# Altium PCB Dashboard2023.PcbDoc
Units mm, origin at the board's own origin, x right, y up, seen from the top; angles counter-clockwise.
Board outline 253.34 x 63.75 mm, 2 copper layers (Top Layer, Bottom Layer); 97 components, 80 nets, 366 pads, 75 vias.
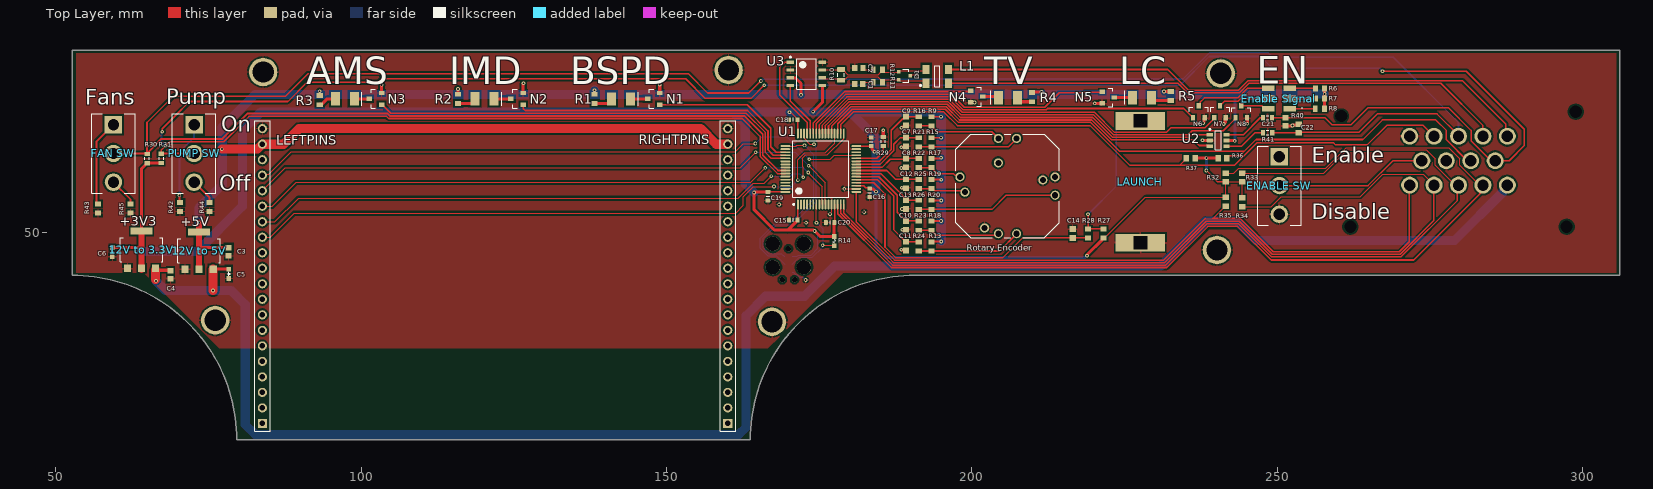
[diagram p0: Top Layer view]
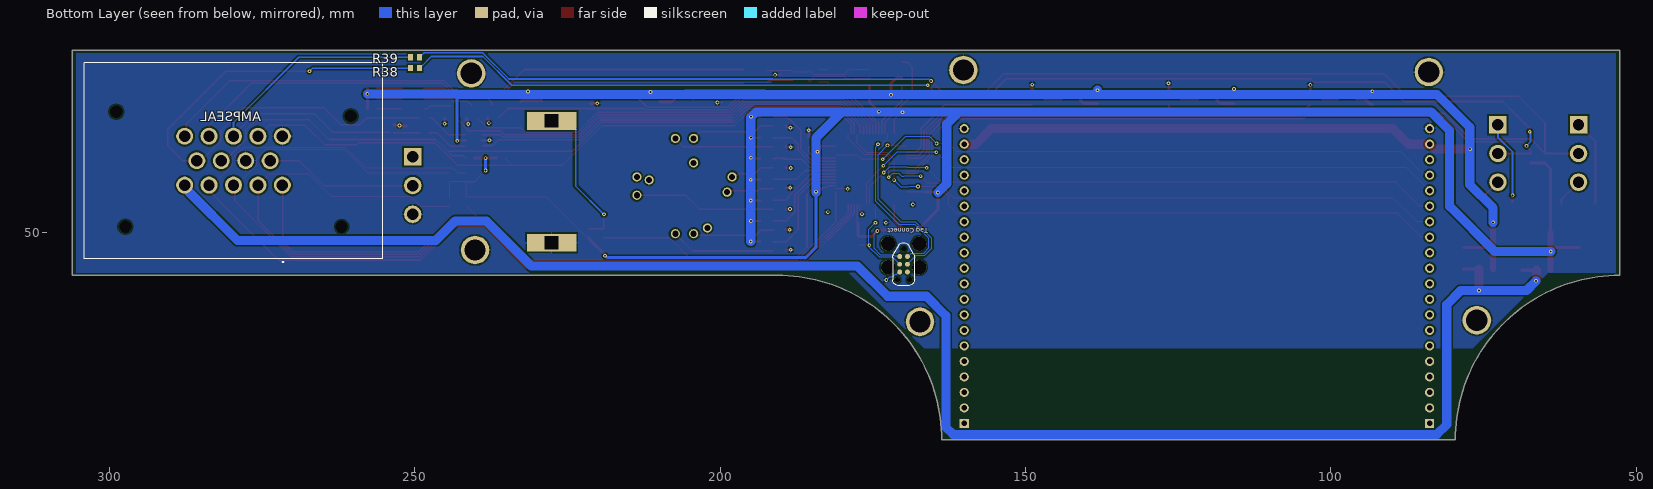
[diagram p1: Bottom Layer view, seen from below]
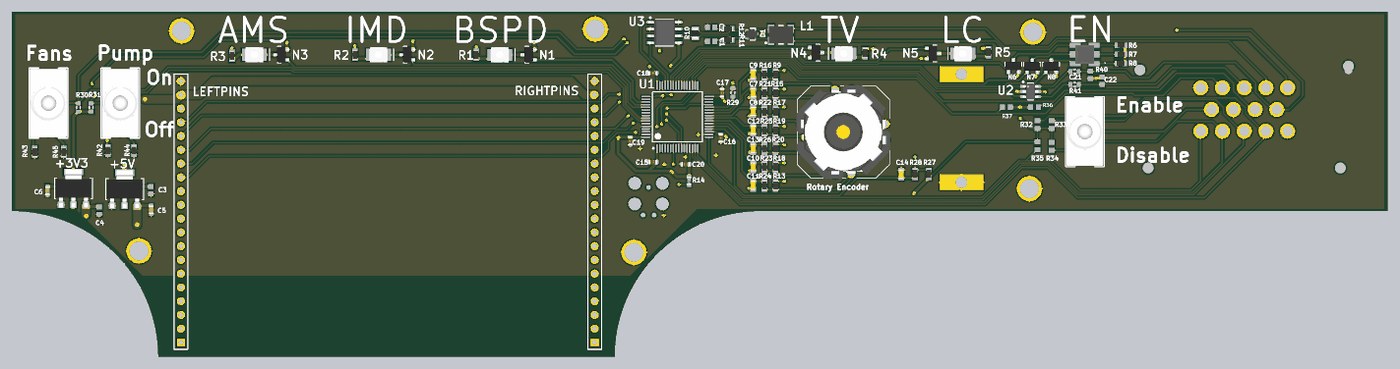
[diagram p2: 3D render of the assembled board from above, using the file's embedded part models]
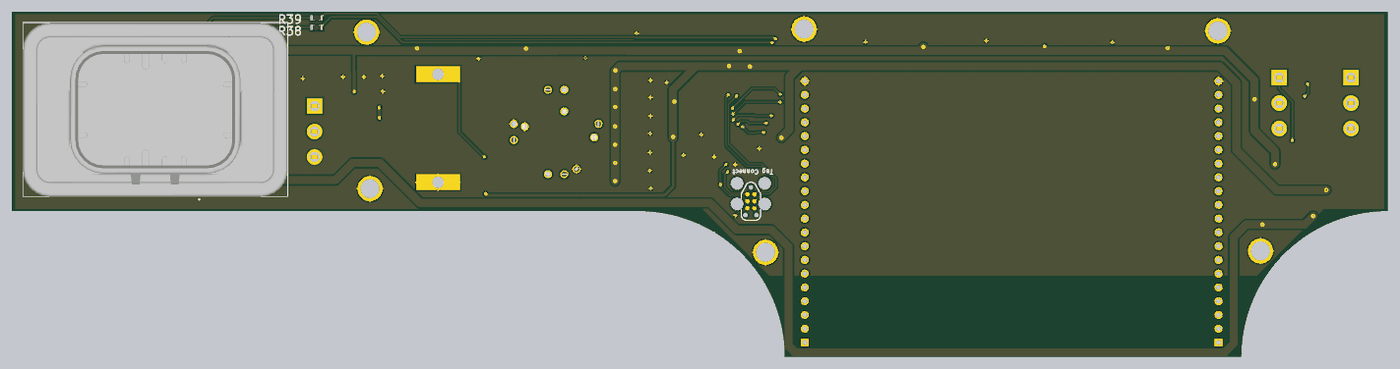
[diagram p3: 3D render of the assembled board from below, using the file's embedded part models]

## Layer stack, top to bottom
Top Solder: solder mask 0.0102, Solder Resist, Dk 3.5
Top Layer: signal copper 0.0356
Dielectric 1: dielectric 0.32, FR-4, Dk 4.8
Bottom Layer: signal copper 0.0356
Bottom Solder: solder mask 0.0102, Solder Resist, Dk 3.5

## Board outline
79.629,16.129 ccw(c52.705,16.129) 52.705,43.053 52.705,79.883 306.045,79.883 306.045,43.053 190.627,43.053 ccw(c190.627,16.129) 163.703,16.129

## Design rules (kind name [scope] priority, off if disabled: settings)
Clearance [All] p1: gap=0.3 ignorepadtopadclearanceinfootprint=FALSE except(0.13: SMDPad-SMDPad; 0.15: Arc-Arc Arc-Track Track-Track; 0.2: Arc-SMDPad Track-SMDPad)
Height [All] p1: minheight=0 maxheight=250.4 prefheight=12.7
PolygonConnect [All] p1: connectstyle=Relief reliefconductorwidth=0.254 reliefentries=4 polygonreliefangle="90 Angle" airgapwidth=0.254
RoutingVias [All] p1: holewidth=0.3 width=0.6 viastyle="Through Hole" minholewidth=0.3 minwidth=0.6 maxholewidth=0.3 maxwidth=0.6
SolderMaskExpansion [All] p1: expansion=0.102 istentingtop=FALSE
Width [All] p1: maxlimit=3 minlimit=0.2 preferedwidth=0.5 minimp=50.000000 maximp=50.000000 favimp=50.000000
29 further rules are at their usual default settings.

## Classes and differential pairs
component class DASH_SWITCHES: C14 "ENABLE SW" "FAN SW" LAUNCH "PUMP SW" R27 R28 R38 R39 R42 R43 R44 R45
component class DASH_REGULATORS: "12V to 3.3V" "12V to 5V" .6 C3 C4 C5 C6 C21 C22 R40 R41 U2
component class DASH_MICROCONTROLLER: C15 C16 C17 C18 C19 C20 R29 R30 R31 U1
component class DASH_CAN: C1 C2 D1 L1 R10 R11 R12 U3

## Components (designator, comment, footprint, x,y, rotation, side; value= is the part's Value field where it differs from the comment)
"12V to 3.3V" "LDO-3.3V-SPX1117" SOT223 64.033,47.246 r0 top
"12V to 5V" "LDO-SOT223_SPX1117" SOT223 73.457,47.092 r0 top
AMPSEAL "776262-1" 7762621 279.655,61.486 r0 bottom
AMS "XZMDK45S" LED_XZFBB45S 97.333,71.933 r0 top
BSPD "XZMDK45S" LED_XZFBB45S 142.545,71.907 r0 top
C1 "560p" CAPC1608X87X35NL15T15 181.468,74.397 r0 top
C2 "560p" CAPC1608X87X35NL15T15 181.483,76.962 r0 top
C3 "2.2 uf" CAPC1608X87X35NL15T15 78.308,46.914 r90 top
C4 "4.7 uf" CAPC1608X87X35NL15T15 68.783,43.155 r90 top
C5 "4.7u" CAP-0603 78.334,43.294 r90 top
C6 "2.2u" CAP-0603 59.258,46.839 r90 top
C7 "10n" CAPC1608X90X35ML10T15 189.205,64.872 r90 top
C8 "10n" CAPC1608X90X35ML10T15 189.205,61.468 r90 top
C9 "10n" CAPC1608X90X35ML10T15 189.205,68.301 r90 top
C10 "10n" CAPC1608X90X35ML10T15 189.205,51.232 r90 top
C11 "10n" CAPC1608X90X35ML10T15 189.205,47.828 r90 top
C12 "10n" CAPC1608X90X35ML10T15 189.205,58.039 r90 top
C13 "10n" CAPC1608X90X35ML10T15 189.205,54.635 r90 top
C14 "10n" CAPC1608X90X35ML10T15 216.484,49.886 r270 top
C15 "1uF" CAPC0603(1608)100_L 170.764,52.095 r0 top
C16 "1uF" CAPC0603(1608)100_L 183.236,56.566 r90 top
C17 "1uF" CAPC0603(1608)100_L 183.49,64.902 r270 top
C18 "1uF" CAPC0603(1608)100_L 170.764,68.529 r0 top
C19 "1uF" CAPC0603(1608)100_L 166.599,56.002 r90 top
C20 "1uF" CAPC0603(1608)100_L 176.784,51.689 r0 top
C21 "2.2 uf" CAPC1608X87X35NL15T15 251.333,68.199 r90 top
C22 "2.2 uf" CAPC1608X87X35NL15T15 253.492,67.096 r270 top
D1 "PESD1CAN-UX" FP-SOT323-MFG 188.951,75.717 r0 top
"Enable Signal" "XZFBBM2ACRDG92W-3" XZFBBM2ACRDG92W3 250.266,71.984 r180 top
"ENABLE SW" "A101SYCB04" FP-A101SYCB04-MFG 250.317,57.734 r0 top
"FAN SW" "A101SYCB04" FP-A101SYCB04-MFG 59.436,62.992 r0 top
IMD "XZMDK45S" LED_XZFBB45S 120.193,71.933 r0 top
L1 "744235900" "WE-CNSW 1812" 194.335,75.616 r0 top
LAUNCH "Fun Button from Home Depot for Dash 2022!" "New footprint 1" 227.584,48.376 r0 top
LC "XZFBB45S" LED_XZFBB45S 227.838,72.136 r180 top (schematic designator LAUNCH)
LEFTPINS "Header 20" HDR1X20 83.82,18.796 r90 top
N1 "NMOS-SOT23" SOT23 147.879,71.933 r90 top
N2 "NMOS-SOT23" SOT23 125.527,71.933 r90 top
N3 "NMOS-SOT23" SOT23 102.337,71.933 r90 top
N4 "NMOS-SOT23" SOT23 200.787,72.314 r270 top
N5 "NMOS-SOT23" SOT23 222.326,72.161 r270 top
N6 "NMOS-SOT23" SOT23 237.15,69.827 r0 top
N7 "NMOS-SOT23" SOT23 240.614,69.818 r0 top
N8 "NMOS-SOT23" SOT23 244.079,69.802 r0 top
"PUMP SW" "A101SYCB04" FP-A101SYCB04-MFG 72.644,62.992 r0 top
R1 "200" RESC1608X55X25ML10T15 138.227,71.933 r90 top
R2 "200" RESC1608X55X25ML10T15 115.875,71.933 r90 top
R3 "200" RESC1608X55X25ML10T15 93.218,71.73 r90 top
R4 "100" RESC1608X55X25ML10T15 209.855,72.212 r90 top
R5 "100" RESC1608X55X25ML10T15 232.537,72.39 r90 top
R6 "200" RESC1608X55X25ML10T15 256.972,73.66 r0 top
R7 "120" RESC1608X55X25ML10T15 256.972,71.984 r0 top
R8 "120" RESC1608X55X25ML10T15 256.946,70.307 r0 top
R9 "5000" RESC1608X55X25ML10T15 193.345,68.25 r90 top
R10 "0805" RESC0805(2012)_L 178.562,75.859 r90 top value="120 o"
R11 "100" RESC1608X55X25ML10T15 184.582,74.651 r0 top
R12 "100" RESC1608X55X25ML10T15 184.582,76.708 r0 top
R13 "5000" RESC1608X55X25ML10T15 193.345,47.777 r90 top
R14 "10k" RES-0603 177.419,48.641 r90 top
R15 "5000" RESC1608X55X25ML10T15 193.345,64.821 r90 top
R16 "10K" RESC1608X55X25ML10T15 191.287,68.25 r90 top
R17 "5000" RESC1608X55X25ML10T15 193.345,61.417 r90 top
R18 "5000" RESC1608X55X25ML10T15 193.345,51.181 r90 top
R19 "5000" RESC1608X55X25ML10T15 193.345,57.988 r90 top
R20 "5000" RESC1608X55X25ML10T15 193.345,54.585 r90 top
R21 "10K" RESC1608X55X25ML10T15 191.287,64.821 r90 top
R22 "10K" RESC1608X55X25ML10T15 191.287,61.417 r270 top
R23 "10K" RESC1608X55X25ML10T15 191.287,51.181 r270 top
R24 "10K" RESC1608X55X25ML10T15 191.287,47.777 r270 top
R25 "10K" RESC1608X55X25ML10T15 191.287,57.988 r90 top
R26 "10K" RESC1608X55X25ML10T15 191.287,54.585 r270 top
R27 "5000" RESC1608X55X25ML10T15 221.564,49.886 r270 top
R28 "10K" RESC1608X55X25ML10T15 219.024,49.886 r270 top
R29 "Res3" J1-0603 185.471,64.952 r90 top value=1K
R30 "Res3" J1-0603 64.948,62.154 r270 top value=1K
R31 "Res3" J1-0603 67.285,62.179 r270 top value=1K
R32 "1.5k" RESC1608X55X30ML15T15 241.554,59.055 r270 top
R33 "1.5k" RESC1608X55X30ML15T15 244.221,59.055 r270 top
R34 "1.5k" RESC1608X55X30ML15T15 244.221,54.991 r90 top
R35 "1.5k" RESC1608X55X30ML15T15 241.554,55.118 r90 top
R36 "1.5k" RESC1608X55X30ML15T15 241.009,62.23 r180 top
R37 "1.5k" RESC1608X55X30ML15T15 235.839,62.23 r0 top
R38 "DNP" RESC1608X55X25ML10T15 249.936,76.962 r0 bottom
R39 "DNP" RESC1608X55X25ML10T15 249.936,78.74 r0 bottom
R40 "Res3" J1-0603 248.387,68.834 r180 top value=1K
R41 "Res3" J1-0603 248.412,66.421 r180 top value=1K
R42 "DNP" RESC1608X55X25ML10T15 70.358,54.229 r90 top
R43 "DNP" RESC1608X55X25ML10T15 56.896,53.975 r90 top
R44 "0ohm" RESC1608X55X25ML10T15 75.184,54.229 r90 top
R45 "0ohm" RESC1608X55X25ML10T15 62.23,53.975 r90 top
RIGHTPINS "Header 20" HDR1X20 160.02,18.796 r90 top
"Rotary Encoder" "RKJXT1F42001" RKJXT1F42001 205.816,57.658 r270 top
"Tag Connect" "TC2030-MCP-NL" TC2030-MCP-NL 169.951,44.856 r270 bottom
TV "XZM2DG45S" LED_XZFBB45S 205.892,72.136 r180 top
U1 "STM32F446RET6" STM-LQFP64_L 175.26,60.452 r90 top
U2 "SN74LVC2G17DBVR" DBV0006A_N 240.309,65.126 r0 top
U3 "SN65HVD256DR" D0008A_L 172.889,76.022 r0 top

## Footprints (in the part's own frame and the unit in brackets; to place one, negate y for a bottom-side part, rotate by r counter-clockwise, add the part's x,y. Pads: shape width x height; smd on the part's side, far side on the other; paste and mask are expansions set on the pad)
7762621 [mm]
  round 2.775 hole 1.85: 1(-8,3.675) 2(-4,3.675) 3(0,3.675) 4(4,3.675) 5(8,3.675) 6(-6,-0.325) 7(-2,-0.325) 8(2,-0.325) 9(6,-0.325) 10(-8,-4.325) 11(-4,-4.325) 12(0,-4.325) 13(4,-4.325) 14(8,-4.325)
  round 1 hole 2 unplated: 15(-19.2,-7.625) 16(-17.7,10.475) 17(17.7,10.475) 18(19.2,-8.325)
  silkscreen extent -24.4,-16.37 24.4,16.37, body extent -24.4,-16.34 24.4,15.76, height 34.38
CAP-0603 [mm]
  rect 0.8x0.75 smd: 1(-0.75,0) 2(0.75,0)
  silkscreen extent -0.3,-0.2 0.3,0.2, body extent -0.8,-0.4 0.8,0.42, height 0.81
CAPC0603(1608)100_L [mm] "Chip Capacitor, Body 1.6x0.8mm, Height 1.0mm, IPC High Density"
  rrect25% 0.66x0.76 smd: 1(-0.7,0) 2(0.7,0)
  silkscreen extent 0,-0.3 0,0.3, body extent -0.8,-0.4 0.8,0.4, height 0.95
CAPC1608X87X35NL15T15 [mm] "Chip Capacitor, 2-Leads, Body 1.60x0.80mm, IPC Medium Density"
  rect 0.9x1 smd: 1(-0.675,0) 2(0.675,0)
  body extent -0.87,-0.48 0.87,0.47, height 0.87
CAPC1608X90X35ML10T15 [mm] "Chip Capacitor, 2-Leads, Body 1.7x0.9mm, IPC Low Density"
  rect 0.95x1.05 smd: 1(-0.725,0) 2(0.725,0)
  body extent -0.85,-0.45 0.85,0.45, height 0.9
D0008A_L [mm] "SOIC, 8-Leads, Body 5x4mm, Pitch 1.27mm, IPC High Density"
  rrect18% 1.25x0.55 smd: 1(-2.625,1.905) 2(-2.625,0.635) 3(-2.625,-0.635) 4(-2.625,-1.905) 5(2.625,-1.905) 6(2.625,-0.635) 7(2.625,0.635) 8(2.625,1.905)
  silkscreen extent -2.75,-2.5 1.6,2.85, body extent -3,-2.45 3,2.45, height 1.63
DBV0006A_N [mm] "SOT23, 6-Leads, Body 3.05x1.75mm, Pitch 0.95mm, IPC Medium Density"
  rrect17% 1x0.6 smd: 1(-1.375,0.95) 2(-1.375,0) 3(-1.375,-0.95) 4(1.375,-0.95) 5(1.375,0) 6(1.375,0.95)
  silkscreen extent -1.5,-1.55 0.5,1.92, body extent -1.42,-1.46 1.42,1.46, height 1.11
FP-A101SYCB04-MFG [mil]
  rect 112.37x112.37 hole 73 paste-39370.1 mask+0: 1(0,185)
  round 112.37 hole 73 paste-39370.1 mask+0: 2(0,0) 3(0,-185)
  silkscreen extent -140,-255 140,255, body extent -144,-259 144,259, height 10
FP-SOT323-MFG [mm]
  rect 0.55x0.6 smd paste-1000 mask+0: 1(-0.925,0.65) 2(-0.925,-0.65) 3(0.925,0)
  silkscreen extent -0.28,-1.1 0.67,1.1, body extent -1.33,-1.2 1.33,1.2, height 0.25
HDR1X20 [mm] "Connector; Header; 20 Position"
  rect 1.5x1.5 hole 0.9: 1(0,0)
  round 1.5 hole 0.9: 2(2.54,0) 3(5.08,0) 4(7.62,0) 5(10.16,0) 6(12.7,0) 7(15.24,0) 8(17.78,0) 9(20.32,0) 10(22.86,0) 11(25.4,0) 12(27.94,0) 13(30.48,0) 14(33.02,0) 15(35.56,0) 16(38.1,0) 17(40.64,0) 18(43.18,0) 19(45.72,0) 20(48.26,0)
  silkscreen extent -1.27,-1.27 49.53,1.27
J1-0603 [mm] "Chip Resistor, Body 1.6x0.8mm, IPC High Density"
  rect 0.7x0.9 smd: 1(-0.75,0) 2(0.75,0)
  silkscreen extent -0.2,-0.35 0.2,0.35, body extent -0.85,-0.48 0.85,0.48, height 0.9
LED_XZFBB45S [mm]
  rect 1.5x2.2 smd: A(-1.55,0) K(1.55,0)
  silkscreen extent 2.8,-1.1 2.8,1.1, body extent -1.75,-1.4 1.75,1.4, height 1.9
"New footprint 1" [mm]
  rect 8.112x2.912 hole 2.15 square: 1(0,0) 2(0,19.95)
RES-0603 [mm]
  rect 0.8x0.75 smd: 1(-0.75,0) 2(0.75,0)
  silkscreen extent -0.3,-0.2 0.3,0.2, body extent -0.8,-0.4 0.8,0.4, height 0.44
RESC0805(2012)_L [mm] "Chip Resistor, Body 2.0x1.3mm, IPC High Density"
  rrect25% 0.76x1.3 smd: 1(-0.9,0) 2(0.89,0)
  silkscreen extent -0.3,-0.55 0.3,0.55, body extent -1,-0.62 1,0.63, height 0.6
RESC1608X55X25ML10T15 [mm] "Chip Resistor, 2-Leads, Body 1.70x0.90mm, IPC Low Density"
  rect 0.8x1 smd: 1(-0.75,0) 2(0.75,0)
  body extent -0.85,-0.45 0.85,0.45, height 0.55
RESC1608X55X30ML15T15 [mm] "Chip Resistor, 2-Leads, Body 1.60x0.80mm, IPC Low Density"
  rect 0.9x1.05 smd: 1(-0.725,0) 2(0.725,0)
  body extent -0.87,-0.48 0.87,0.48, height 0.55
RKJXT1F42001 [mm]
  round 1.5 hole 1: 1(-1.5,-7.8) 2(1,-6.98) 3(6.86,-3.75) 4(7.8,-1.5) 5(7.8,1.5) 6(1.5,7.8) 7(-1,5.78) 8(-1.5,7.8) 9(-7.8,1.5) 10(-7.8,-1.5) 11(-3.8,-1.5)
  silkscreen extent -8.5,-8.5 8.5,8.5, body extent -8.6,-8.6 8.6,8.6, height 17.4
SOT23 [mm]
  rect 0.7x0.9 smd: 1(-0.95,-1) 2(0.95,-1) 3(0,1)
  silkscreen extent -1.55,0 1.55,0.71, body extent -1.45,-1.41 1.45,1.41, height 1.5
SOT223 [mm]
  rect 1.2x1.2 smd: 1(-2.3,-3.05) 2(0,-3.05) 3(2.3,-3.05)
  rect 3.6x1.2 smd: 4(0,3.05)
  silkscreen extent -3.5,-1.95 3.5,1.95, body extent -3.25,-3.52 3.25,3.5, height 1.8
STM-LQFP64_L [mm] "QFP, 64-Leads, Body 10x10mm, Pitch 0.5mm, IPC High Density"
  oval 1.6x0.3 smd: 1(-5.8,3.75) 2(-5.8,3.25) 3(-5.8,2.75) 4(-5.8,2.25) 5(-5.8,1.75) 6(-5.8,1.25) 7(-5.8,0.75) 8(-5.8,0.25) 9(-5.8,-0.25) 10(-5.8,-0.75) 11(-5.8,-1.25) 12(-5.8,-1.75) 13(-5.8,-2.25) 14(-5.8,-2.75) 15(-5.8,-3.25) 16(-5.8,-3.75) 33(5.8,-3.75) 34(5.8,-3.25) 35(5.8,-2.75) 36(5.8,-2.25) 37(5.8,-1.75) 38(5.8,-1.25) 39(5.8,-0.75) 40(5.8,-0.25) 41(5.8,0.25) 42(5.8,0.75) 43(5.8,1.25) 44(5.8,1.75) 45(5.8,2.25) 46(5.8,2.75) 47(5.8,3.25) 48(5.8,3.75)
  oval 0.3x1.6 smd: 17(-3.75,-5.8) 18(-3.25,-5.8) 19(-2.75,-5.8) 20(-2.25,-5.8) 21(-1.75,-5.8) 22(-1.25,-5.8) 23(-0.75,-5.8) 24(-0.25,-5.8) 25(0.25,-5.8) 26(0.75,-5.8) 27(1.25,-5.8) 28(1.75,-5.8) 29(2.25,-5.8) 30(2.75,-5.8) 31(3.25,-5.8) 32(3.75,-5.8) 49(3.75,5.8) 50(3.25,5.8) 51(2.75,5.8) 52(2.25,5.8) 53(1.75,5.8) 54(1.25,5.8) 55(0.75,5.8) 56(0.25,5.8) 57(-0.25,5.8) 58(-0.75,5.8) 59(-1.25,5.8) 60(-1.75,5.8) 61(-2.25,5.8) 62(-2.75,5.8) 63(-3.25,5.8) 64(-3.75,5.8)
  silkscreen extent -5.92,-4.6 4.6,4.6, body extent -5,-5 5,5, height 1.6
TC2030-MCP-NL [mm] "Conector ICD en placa"
  round 0.8 smd paste-0.4: 1(-1.27,-0.635) 2(-1.27,0.635) 3(0,-0.635) 4(0,0.635) 5(1.27,-0.635) 6(1.27,0.635)
  round 0.85 hole 0.9 unplated mask+0: ""(-2.54,0) ""(2.54,-1.016) ""(2.54,1.016)
  silkscreen extent -3.54,-1.8 3.5,1.8, body extent -3.54,-1.8 3.5,1.8
"WE-CNSW 1812" [mm] "SMD Line Filter, 4-Leads, Body 4.5x3.2mm"
  rect 1.15x1.55 smd: 1(-1.825,-1.125) 2(1.825,-1.125) 3(1.825,1.125) 4(-1.825,1.125)
  silkscreen extent -2.9,-1.7 0.43,1.7, body extent -2.25,-1.6 2.25,1.6, height 2.8
XZFBBM2ACRDG92W3 [mm]
  rect 2x0.9 smd: 1(-1.75,1.7) 3(-1.75,-1.7) 4(1.75,1.7) 6(1.75,-1.7)
  rect 2x1.2 smd: 2(-1.75,0) 5(1.75,0)
  silkscreen extent -3.8,1.5 -3.7,1.6, body extent -1.75,-1.75 1.75,1.75, height 1.35

## Part data
"12V to 3.3V": library part LDO-SOT223_SPX1117
"12V to 5V": library part CMP-015-000050-1, Design Item ID=LDO-SOT223_SPX1117, Source=ife19_Elec_Library.SchLib
AMPSEAL: "Connector", Manufacturer_Name="TE Connectivity", Mouser Part Number=571-776262-1, Arrow Part Number=776262-1, Arrow Price/Stock=https://www.arrow.com/en/products/776262-1/te-connectivity, Datasheet Link=http://www.te.com/commerce/DocumentDelivery/DDEController?Action=showdoc&DocId=Customer+Drawing%7F776262%7FA8%7Fpdf%7FEnglish%7FENG_CD_776262_A8.pdf%7F776262-1, Height=34mm, Manufacturer_Part_Number=776262-1, Mouser Price/Stock=https://www.mouser.co.uk/ProductDetail/TE-Connectivity-AMP/776262-1?qs=tLAa1RwIH6f%2FfrCrHR1d%252Bw%3D%3D
AMS BSPD IMD LC TV: library part CMP-009-000234-1, Design Item ID=LED_XZFBB45S, Source=ife19_Elec_Library.schlib
C1 C2 C3 C4 C21 C22: library part CMP-2006-03887-1, ".1 uf", Manufacturer=Kemet, Part Number=C0603C104J3RAC7867
C5 C6: library part CAP-0603
C7 C8 C9 C10 C11 C12 C13 C14: library part CMP-2100-03642-1, "Chip Capacitor, 10 nF, +/- 10%, 50 V, -55 to 125 degC, 0603 (1608 Metric), RoHS, Tape and Reel", Capacitance=10nF, Case Code (Imperial)=0603, Case Code (Metric)=1608, Dielectric=X7R, Dielectric Material=Ceramic, Insulation Resistance=10GR, Manufacturer=Murata, Max Operating Temperature=125degC, Min Operating Temperature=-55degC, Package Description="2-Pin Surface Mount Device, Body 1.6 x 0.8 mm", Package Quantity=1, Tolerance=10%, Voltage=50V, Case/Package=0603, Datasheet URL=http://search.murata.co.jp/Ceramy/image/img/A01X/G101/ENG/GRM188R71H103KA01-01.pdf, Datasheet Version=42401.0, Depth=0.8mm, Height=0.8mm, Lead Free=LeadFree, Length=1.6mm, Manufacturer URL=http://www.murata.com/, Material=Ceramic, Mount=SurfaceMount, Number of Pins=2, Package Reference=0603, Packaging=TapeandReel, REACH SVHC=Unknown, RoHSCompliant=True, Termination=SMD/SMT, Thickness=0.035inch, Voltage Rating=50V, Voltage Rating (DC)=50V, Width=0.031inch
C15 C16 C17 C18 C19 C20: library part CMP-005-000568-1, "Chip Capacitor, 1 uF, +/- 10%, 6.3 V, 0402 (1005 Metric)", Available Preview Images=2D, Design Item ID=CMP-001-00008-4, Source="Integrated_Library - 12.03.21 - 15.39.SchLib"
D1: library part CMP-14436-000006-1, "TVS DIODE 24V 50V SC70-3"
"Enable Signal": "LED", Manufacturer_Name=SunLED, Datasheet Link=https://www.sunledusa.com/products/spec/XZFBBM2ACRDG92W-3.pdf, Height=1.25mm, Manufacturer_Part_Number=XZFBBM2ACRDG92W-3
"ENABLE SW" "FAN SW" "PUMP SW": library part CMP-03408-000017-1, "SWITCH TOGGLE SPDT 0.4VA 20V", Actuator Color=Chrome, Contact Current Rating=400mA, Contact Resistance=10mR, Flammability Rating="UL94 V-1", Insulation Resistance=30MR, Max Operating Temperature=85°C, Max Voltage Rating (AC)=20V, Min Operating Temperature=-30°C, Package Quantity=100, Power Rating=400mW, Actuator Length=10.41mm, Actuator Material=Phenolic, Actuator Type="Standard Round", Contact Material=Copper, Contact Plating=Gold, Depth=6.86mm, Electrical Life=6000Cycles, ELV=Compliant, Illumination Type=Non-Illuminated, Lead Free="Lead Free", Max Voltage Rating (DC)=20V, Mount=Panel, Number of Poles=1, Number of Positions=2, Orientation=Straight, Packaging=Bulk, Radiation Hardening=No, REACH SVHC="No SVHC", RoHS Compliant=Yes, Series="Gemini A", Switch Function=On-On, Termination="PC Pins", Throw Configuration=SPDT, Voltage Rating (AC)=20V, Voltage Rating (DC)=20V
L1: library part CMP-1372-00007-1, "SMD Shielded Coupled Inductor WE-CNSW, Z=90 Ohm", Manufacturer="Wuerth Elektronik", ComponentLink1Description="Manufacturer URL", ComponentLink1URL=http://www.we-online.com, ComponentLink2Description=Datasheet, ComponentLink2URL=http://katalog.we-online.de/pbs/datasheet/744235900.pdf, Impedance="90 Ohm", PackageReference="WE-CNSW 1812", PartNumber=744235900
LAUNCH: library part HOME-DEPOT-BUTTON-DASH-2022-1, "This is the very fun and very interesting button from Home Depot to be used for the IFE Dashboard 2022"
LEFTPINS RIGHTPINS: "Header, 20-Pin", LatestRevisionDate=17-Jul-2002, LatestRevisionNote="Re-released for DXP Platform.", Publisher="Altium Limited"
N1 N2 N3 N4 N5 N6 N7 N8: library part CMP-009-000226-1, Design Item ID=NMOS-SOT23, Source=ife19_Elec_Library.schlib
R1 R2 R3 R4 R5 R6 R7 R8 R9 R11 R12 R13 R15 R16 R17 R18 R19 R20 R21 R22 R23 R24 R25 R26 R27 R28: library part CMP-009-000010-1, "Chip Resistor, 0 Ohm, 0.1 W, -55 to 155 degC, 0603 (1608 Metric)", Design Item ID=CMP-009-00006-4, Source="Integrated_Library - 12.03.21 - 15.39.SchLib"
R10: library part CMP-009-000170-1, "Chip Resistor, 4,7 Ohms, +/-5 %, 125 mW, -55 to 155 degC, 0805", Available Preview Images=2D, Design Item ID=CMP-009-00174-2, Source="Integrated_Library - 12.03.21 - 15.39.SchLib"
R14: library part RES-0603
R29 R30 R31 R40 R41: "Resistor", LatestRevisionDate=29-May-2009, LatestRevisionNote="IPC-7351 Footprint Added.", PackageDescription="Chip Resistor", PackageReference=J1-0603, Published=8-Jun-2000, Publisher="Altium Limited"
R32 R33 R34 R35 R36 R37: library part CMP-1012-00528-2, Manufacturer=Panasonic, Part Number=ERJ-3EKF1501V
R38 R39 R42 R44: library part CMP-009-000010-1, "Can be used to set dual set constant speed of pump with no PWM /  / Chip Resistor, 0 Ohm, 0.1 W, -55 to 155 degC, 0603 (1608 Metric)", Design Item ID=CMP-009-00006-4, Source="Integrated_Library - 12.03.21 - 15.39.SchLib"
R43 R45: library part CMP-009-000010-1, "Can be used to set dual set constant speed of fans with no PWM /  / Chip Resistor, 0 Ohm, 0.1 W, -55 to 155 degC, 0603 (1608 Metric)", Design Item ID=CMP-009-00006-4, Source="Integrated_Library - 12.03.21 - 15.39.SchLib"
"Rotary Encoder": "Switch", Manufacturer_Name=ALPS, Mouser Part Number=688-RKJXT1F42001, Datasheet Link=http://www.alps.com/prod/info/E/HTML/MultiControl/Switch/RKJXT/RKJXT1F42001.html, Height=17mm, Manufacturer_Part_Number=RKJXT1F42001, Mouser Price/Stock=https://www.mouser.co.uk/ProductDetail/ALPS/RKJXT1F42001?qs=6EGMNY9ZYDTsBzSTrhiL0w%3D%3D
"Tag Connect": library part CMP-003-000769-1, "Conector par ICD", Design Item ID=TC2030-MCP-NL, Source="Image Pasted at 2021-10-31 17-08.SchLib"
U1: library part CMP-0243-00218-1, "ARM Cortex-M4 32-bit MCU+FPU, 512 KB Flash, 128 KB Internal RAM, 50 I/Os, 64-Pin LQFP, -40 to 85 degC, Tray", I/Os (High Current)=50, Operating Frequency(F) (Processor speed) (MHz)=180, Package Description=LQFP64, Package Reference="64-Pin Low-profile Quad Flat Package, Body 10 x 10 mm, Pitch 0.5 mm", Supply Voltage(Vcc) min (V)=1.7, ComponentLink1Description="Manufacturer URL", ComponentLink1URL=http://www.st.com/, ComponentLink2Description=Datasheet, ComponentLink2URL=http://www.st.com/st-web-ui/static/active/en/resource/technical/document/datasheet/DM00141306.pdf, Core="ARM Cortex-M4", D/A Converter=2, DatasheetVersion="Rev. 6", FLASH Size (Prog) (kB)=512, Internal RAM Size (kB)=128, Mounting Technology="Surface Mount", Packing=Tray
U2: library part CMP-0859-00225-4, "Dual Schmitt-Trigger Buffer, DBV0006A, LARGE T&R", F @ Nom Voltage(Max)(Mhz)=150, Generic Part Number=SN74LVC2G17, ICC @ Nom Voltage(Max)(mA)=0.01, Manufacturer="Texas Instruments", Operating Temperature Range(C)="-40 to 125,-40 to 85", Rating=Catalog, tpd @ Nom Voltage(Max)(ns)=9.3,5.7,5.4,4.3, Voltage(Nom)(V)=1.8,2.5,3.3,5, 3-State Output=No, Bits(#)=2, DatasheetVersion=SCES381N, Input Type=CMOS/TTL, Logic=True, Output Drive (IOL/IOH)(Max)(mA)=32/-32, Output Type=CMOS, PackageReference=DBV0006A, Schmitt Trigger=Yes, Sub-Family="Non-Inverting Buffer/Driver", Technology Family=LVC, VCC(Max)(V)=5.5, VCC(Min)(V)=1.65
U3: library part CMP-0315-00070-2, "CAN Transceiver with Fast Loop Times for Highly Loaded Networks, 85 mA, 5 V, -40 to 125 degC, 8-pin SOIC (D), Green (RoHS & no Sb/Br)", Bus Fault Voltage(V)="-27 to 40", Drivers Per Package=1, Manufacturer="Texas Instruments", Rating=Catalog, Supply Voltage(s)(V)=5, Code_JEDEC=MS-012AA, ComponentLink1Description=Datasheet, ComponentLink1URL=http://www.ti.com/general/docs/lit/getliterature.tsp?genericPartNumber=SN65HVD256&fileType=pdf, DatasheetVersion=SLLSEA2, Eco-Plan="Green (RoHS & no Sb/Br)", Features="Short prop delay, Fast loop times, RXD supply input", ICC(Max)(mA)=85, Isolated=No, Mounting Technology="Surface Mount", PackageDescription="8-Pin Plastic Small Outline Integrated Circuit, 4.9 x 3.9 mm, Pitch 1.27 mm Pitch", PackageReference=D0008A, PackageVersion="revM, Jun-2011", PartNumber=SN65HVD256DR, Receivers Per Package=1, SubFamily=CAN

## Free pads (board coordinates)
  round 4.65 hole 3.5: 2(76.098,35.687) 2(83.947,76.327) 2(160.147,76.657) 2(167.259,35.433) 2(240.106,47.193) 2(240.741,76.098)
  round 2.375 hole 2.375 paste+0: 3(167.411,44.374) 3(167.411,48.184) 3(172.491,48.184) 3(172.494,44.377)

## Via types
v1: diameter 0.6, hole 0.3, Top Layer to Bottom Layer, 75 vias

## Nets (pads, with @x,y where several pads share a name; then routed paths per layer and width w, separated by ;. In a path a pad name is that pad's centre, name@x,y a point inside that pad or via, vN(x,y) a via of type N, cw(c..) or ccw(c..) an arc to the next point about the centre after c; other vN are vias at no path point)
+3.3V: "12V to 3.3V.2" "12V to 3.3V.4" "Tag Connect.1" C6.2 C15.2 C16.2 C17.2 C18.2 C19.2 C20.2 R9.2 R13.2 R14.2 R15.2 R17.2 R18.2 R19.2 R20.2 R27.2 R30.2 R31.2 R32.2 R33.2 R34.2 R35.2 R36.2 R37.2 U1.1 U1.13 U1.19 U1.32 U1.48 U1.64 U3.5 | length 379.4
  Top Layer w0.2: v1@170.371,69.672 171.464,68.579 C18.2 ; R27.2 221.664,49.136 228.372,55.843 R35.2 R32.2 R33.2 R34.2
  Top Layer w0.254: C19.2 U1.64 ; C15.2 171.501,52.132 171.501,54.643 U1.1 ; C18.2 171.51,68.483 U1.48 ; C20.2 177.533,51.738 177.533,53.967 177.51,53.99 U1.13 ; U1.19 181.069,57.693 182.286,57.693 182.628,57.351 C16.2@183.15,57.351 ; U1.32 C17.2 ; v1(238.379,60.198) 240.247,58.33 R32.2
  Top Layer w0.3: R13.2 193.376,48.559 194.939,48.559 v1(194.97,48.59) ; R18.2 194.957,51.931 v1(194.945,51.943) ; R20.2 193.364,55.315 194.951,55.315 v1(194.97,55.296) ; R19.2 193.364,58.719 194.951,58.719 v1(194.97,58.699) ; R17.2 v1@194.75,62.167 ; R15.2 193.351,65.577 194.939,65.577 v1(194.945,65.583) ; R9.2 193.358,69.013 194.906,69.013 v1(194.92,69.026)
  Top Layer w0.5: C6.2 63.972,47.589 64.008,47.625 ; 64.033,50.241 64.033,50.296 64.033,60.489 64.748,61.204 64.748,61.304 64.848,61.404 R30.2 64.961,61.416 67.272,61.416 R31.2 ; C19.2 164.476,56.702 164.365,56.591 v1(164.338,56.591) 164.338,53.772 167.646,50.464 169.863,50.464 174.045,50.464 174.217,50.292 v1(174.244,50.292) 175.145,49.391 177.294,49.391 177.404,49.501 177.404,51.609 C20.2 ; 169.863,50.444 171.464,52.046 C15.2 ; v1(173.99,69.85) 175.514,71.374 U3.5 ; C16.2@183.285,57.266 183.366,57.186 183.835,57.186 v1@184.258,56.763 ; C17.2 183.539,64.202 183.62,64.122 183.62,63.7 v1@184.029,63.291 ; v1(218.821,46.262) 218.84,46.281 218.84,46.412 221.314,48.886 221.314,48.986 221.464,49.136 R27.2 ; R37.2 v1(238.379,62.23) R36.2
  Top Layer w1: 64.008,43.915 64.008,47.625 64.008,50.015
  Bottom Layer w0.2: 170.586,46.126 171.361,46.126 171.59,46.355 173.66,46.355 174.752,47.447 174.752,49.81 174.27,50.292 v1(174.244,50.292)
  Bottom Layer w0.5: v1(184.277,56.744) 184.277,47.625 185.928,45.974 218.506,45.974 218.794,46.262 v1(218.821,46.262) ; v1(238.379,60.198) v1(238.379,62.23)
  Bottom Layer w1.5: v1(63.983,46.939) 73.152,46.939 80.543,54.331 80.543,66.736 83.606,69.799 160.884,69.799 ; v1(164.338,56.591) 162.886,58.043 162.886,67.796 160.884,69.799 ; v1@184.302,56.591 184.302,63.271 184.302,65.532 180.035,69.799 ; v1(194.97,48.59) v1(194.97,55.296) v1(194.97,58.699) 194.97,68.921 194.092,69.799 180.035,69.799 ; 160.884,69.799 180.035,69.799
  other v1: 194.945,62.281 184.048,63.271 170.129,69.748
+5: "12V to 5V.2" "12V to 5V.4" C3.2 LEFTPINS.19 R1.2 R2.2 R3.2 R4.2 R5.2 R6.2 R7.2 R8.2 RIGHTPINS.19 U2.5 U3.3 | length 319.5
  Top Layer w0.5: 73.431,47.891 73.733,47.589 C3.2 ; v1(115.849,73.558) 115.862,73.546 115.862,72.695 R2.2 ; U3.3 170.289,75.362 171.119,75.362 172.009,74.473 v1(172.009,72.593) ; R4.2@209.855,72.835 R4.2@209.924,72.904 ; R4.2@209.924,73.031 v1@211.36,73.031 ; v1@211.36,72.904 v1@211.379,72.923 ; v1@231.445,73.001 v1@231.451,73.007 ; v1@231.451,73.134 R5.2@232.537,73.134 ; U2.5 241.695,65.115 242.934,65.115 243,65.049 v1(243.027,65.049) ; R8.2 257.709,70.32 257.709,73.647 R6.2
  Top Layer w1: 73.457,44.042 73.431,44.067 73.431,47.891 v1(73.431,51.714) v1@73.457,51.689
  Top Layer w1.5: v1(77.191,63.703) 83.007,63.703 LEFTPINS.19 87.274,64.516 89.84,67.081 155.575,67.081 158.14,64.516 RIGHTPINS.19
  Bottom Layer w0.5: v1(115.849,73.558) 115.869,73.539 115.869,72.726 115.926,72.669 ; v1(243.027,65.049) 243.027,68.86 243.053,68.886 243.053,72.669
  Bottom Layer w1.5: v1(73.431,51.714) 73.431,54.077 77.241,57.887 77.241,67.285 82.626,72.669 93.193,72.669 115.926,72.669 138.176,72.669 ; v1(138.201,73.355) 138.201,72.695 138.176,72.669 ; v1(257.734,72.746) 243.129,72.746 243.053,72.669 205.636,72.669 205.615,72.69 192.781,72.69 192.761,72.669 172.009,72.669 138.176,72.669
  other v1: 211.379,73.05 231.445,73.128 93.193,73.177
+12: "12V to 3.3V.3" "12V to 5V.3" AMPSEAL.5 C4.2 C5.2 | length 283.7
  Top Layer w0.5: 66.308,43.915 66.35,43.872 68.741,43.872 C4.2 ; 75.757,44.042 75.758,44.043 C5.2 C5.2
  Top Layer w1.5: v1@66.308,42.407 66.308,43.915 ; v1(75.743,40.564) 75.757,40.578 75.757,44.042
  Bottom Layer w1.5: v1(66.396,42.139) 67.97,40.564 v1(75.743,40.564) 78.715,40.564 81.026,38.252 81.026,18.605 82.635,16.996 161.837,16.996 163.017,18.176 163.017,36.449 166.192,39.624 172.568,39.624 177.495,44.552 230.861,44.552 238.252,51.943 243.332,51.943 246.507,48.768 279.019,48.768 287.018,56.767 287.018,56.829 287.655,57.466 AMPSEAL.5
AMS_LED_ON: N3.1 U1.53 | length 71.7
  Top Layer w0.254: N3.1 103.429,70.891 103.529,70.891 104.849,69.571 163.017,69.571 166.179,66.409 166.179,63.158 167.112,62.225 168.775,62.225 168.798,62.202 U1.53
BSPD_LED_ON: N1.1 U1.51 | length 25.6
  Top Layer w0.3: N1.1 163.205,70.983 167.056,67.132 167.056,64.084 167.938,63.202 U1.51
CAN_H: AMPSEAL.14 L1.3 | length 98.3
  Top Layer w0.254: L1.3 232.06,76.741 235.454,73.346 243.641,73.346 245.186,74.891 280.303,74.891 287.379,67.815 287.379,66.087 AMPSEAL.14
CAN_L: AMPSEAL.13 L1.2 | length 93.4
  Top Layer w0.254: L1.2 233.738,74.491 235.287,72.942 243.809,72.942 245.353,74.487 276.744,74.487 276.818,74.413 cw(c276.639,74.233) 276.819,74.412 283.655,67.576 AMPSEAL.13
CAN_RX: U1.44 U3.4 | length 9.2
  Top Layer w0.254: U3.4 170.264,71.6 173.51,68.354 U1.44
CAN_TX: U1.45 U3.1 | length 14.8
  Top Layer w0.254: U3.1 169.342,77.927 168.504,77.089 168.504,72.614 173.01,68.108 U1.45
D_1: C7.2 R21.2 U1.26 | length 12.7
  Top Layer w0.254: U1.26 184.925,61.202 187.196,63.472 187.196,64.514 188.279,65.597 191.262,65.597 R21.2
ENABLE_SIG: "ENABLE SW.2" AMPSEAL.6 | length 25
  Top Layer w0.254: 250.317,57.734 264.846,57.734 268.923,61.811 AMPSEAL.6
ENCODE_A: C9.2 R16.2 U1.27 | length 15.1
  Top Layer w0.254: U1.27 184.854,61.702 186.792,63.64 186.792,66.802 188.667,68.678 188.857,68.678 C9.2 189.23,69 R16.2
ENCODE_B: C11.2 R24.1 U1.21 | length 17.7
  Top Layer w0.254: U1.21 181.893,58.702 184.528,58.702 187.173,56.058 187.173,50.535 189.155,48.553 C11.2 191.262,48.553 R24.1
FAN_EN: "FAN SW.2" R30.1 R39.1 U1.57 | length 315.6
  Top Layer w0.254: 64.948,68.076 69.262,72.39 87.63,72.39 91.273,76.033 153.57,76.033 156.705,72.898 163.466,72.898 v1(165.432,74.864)
  Top Layer w0.3: 59.436,62.992 R30.1@64.895,62.992 ; R30.1 R30.1@64.948,63.044 ; 64.948,68.076 R30.1@64.948,63.044 ; U1.57 168.265,60.202 165.735,62.732 165.735,66.142 162.733,69.144 104.672,69.144 104.27,69.545 81.432,69.545 77.267,65.38 67.283,65.38 R30.1@64.948,63.044
  Bottom Layer w0.254: v1(165.432,74.864) 165.489,74.864 165.754,75.129 190.681,75.129 191.284,75.129 191.339,75.184 234.569,75.184 238.887,79.502 248.424,79.502 248.813,79.113 248.913,79.113 249.186,78.84 R39.1
FANPWM: AMPSEAL.12 C22.2 R39.2 R41.1 | length 68.5
  Top Layer w0.254: R41.1 C22.2 ; 254,66.472 263.347,66.472 266.344,69.469 276.149,69.469 279.655,65.963 AMPSEAL.12
  Bottom Layer w0.254: R39.2 268.986,78.74 279.655,68.071 AMPSEAL.12
FANPWM3.3: U1.37 U2.3 | length 67.1
  Top Layer w0.254: U1.37 177.01,67.434 180.211,70.636 195.785,70.636 197.945,68.476 219.604,68.476 222.849,65.231 236.267,65.231 237.195,64.303 238.807,64.303 U2.3
FLOW0: AMPSEAL.11 R37.1 U1.34 | length 108.5
  Top Layer w0.254: U1.34 178.51,67.745 180.592,69.828 195.348,69.828 197.612,67.564 219.329,67.564 225.806,61.087 234.046,61.087 ; R37.1 235.114,62.155 234.046,61.087 ; AMPSEAL.11 273.841,67.626 267.93,67.626 264.693,64.389 259.512,64.389 259.131,64.77 246.714,64.77 243.031,61.087 234.046,61.087
FLOW1: AMPSEAL.8 R36.1 U1.35 | length 118.2
  Top Layer w0.254: U1.35 178.01,67.863 180.379,70.232 195.618,70.232 197.778,68.072 219.437,68.072 224.185,63.324 244.553,63.324 ; R36.1 241.734,62.305 242.057,62.628 243.857,62.628 244.553,63.324 ; AMPSEAL.8 281.089,61.811 277.673,65.228 277.673,66.751 275.946,68.478 267.208,68.478 264.008,65.278 246.507,65.278 244.553,63.324
GND: "12V to 3.3V.1" "12V to 5V.1" "ENABLE SW.3" "Rotary Encoder.3" "Rotary Encoder.7" "Rotary Encoder.8" "Tag Connect.5" AMPSEAL.7 AMPSEAL.10 C1.1 C2.1 C3.1 C4.1 C5.1 C6.1 C7.1 C8.1 C9.1 C10.1 C11.1 C12.1 C13.1 C14.1 C15.1 C16.1 C17.1 C18.1 C19.1 C20.1 C21.1 C22.1 D1.3 LAUNCH.1 LEFTPINS.20 N1.2 N2.2 N3.2 N4.2 N5.2 N6.2 N7.2 N8.2 pad.2 R29.2 R42.1 R43.1 R44.1 R45.1 RIGHTPINS.20 U1.12 U1.18 U1.31 U1.47 U1.60 U1.63 U2.2 U3.2 U3.8 | length 26.9
  Top Layer w0.2: v1(176.759,53.061) 176.759,53.169 177.01,53.42 U1.12 ; v1@179.045,57.252 v1(179.094,57.202) U1.18 ; D1.3 190.014,75.856 v1(190.983,75.856)
  Top Layer w0.5: N3.2 103.337,74.203 v1(103.353,74.219) ; N2.2 126.527,74.457 v1(126.568,74.498) ; v1(148.869,74.27) 148.879,74.26 N1.2 ; R29.2 v1(185.471,66.802) ; v1(188.426,47.23) 188.445,47.211 189.097,47.211 C11.1 ; v1(188.426,60.616) 188.445,60.635 189.097,60.635 C8.1 ; v1(188.426,64.02) 188.445,64.039 189.097,64.039 C7.1 ; v1(188.468,67.208) 188.495,67.208 188.637,67.351 188.98,67.351 C9.1 ; v1(188.493,57.379) 188.513,57.359 189.159,57.359 C12.1 ; v1(188.544,53.899) 188.55,53.905 189.199,53.905 C13.1 ; v1(188.595,50.495) 188.601,50.501 189.199,50.501 C10.1 ; N4.2@199.787,71.237 199.871,71.321 200.412,71.321 v1(200.431,71.34) ; v1@220.099,71.204 N5.2@221.319,71.204 ; N5.2@221.107,71.069 N5.2@221.115,71.077 ; v1(237.744,65.151) 237.757,65.138 238.922,65.138 U2.2 ; v1(237.846,67.961) 237.846,67.988 238,68.142 238,68.727 N6.2 ; v1(241.22,67.821) 241.22,67.849 241.464,68.092 241.464,68.718 N7.2 ; N8.2 245.065,68.765 245.065,67.888 v1(245.085,67.869) ; C21.1 v1@252.476,67.524 ; v1(252.476,67.564) 252.503,67.564 252.574,67.635 253.306,67.635 C22.1@253.442,67.771
  Bottom Layer w0.2: 170.586,43.586 170.736,43.586 171.156,43.166 171.387,43.166 171.8,42.754 172.282,42.754 v1(172.771,42.266)
  other v1: 172.847,51.664 182.347,53.391 168.427,54.635 220.091,71.196
IMD_LED_ON: N2.1 U1.52 | length 48.5
  Top Layer w0.3: N2.1 126.527,70.349 126.848,70.028 163.246,70.028 166.606,66.668 166.606,63.594 167.498,62.702 168.81,62.702 U1.52
LAUNCH_EN: C14.2 R28.2 U1.20 | length 49.5
  Top Layer w0.254: U1.20 183.911,58.202 185.758,56.355 185.758,47.668 187.477,45.949 205.071,45.949 208.283,49.161 C14.2 218.999,49.161 R28.2
LAUNCH_LED_ON: N5.1 U1.42 | length 52.2
  Top Layer w0.254: U1.42 174.519,66.261 174.519,67.89 179.285,72.656 196.622,72.656 198.718,70.56 211.911,70.56 214.274,72.923 218.415,72.923 ; 218.415,73.05 N5.1@221.265,73.05
NetAMS_A: AMS.A R3.1 | length 3
  Top Layer w0.5: R3.1 93.368,71.13 93.634,71.13 94.437,71.933 AMS.A
NetAMS_K: AMS.K N3.3 | length 2.5
  Top Layer w0.5: AMS.K N3.3
NetBSPD_A: BSPD.A R1.1 | length 3.2
  Top Layer w0.5: R1.1 140.495,71.183 140.995,71.683 BSPD.A
NetBSPD_K: BSPD.K N1.3 | length 2.8
  Top Layer w0.5: BSPD.K 144.12,71.933 N1.3
NetC1_2: C1.2 R11.1 | length 1.8
  Top Layer w0.2: C1.2 182.397,74.651 R11.1
NetC2_2: C2.2 R12.1 | length 1.8
  Top Layer w0.2: C2.2 182.412,76.708 R12.1
NetD1_1: D1.1 L1.4 R10.2 R12.2 U3.7 | length 18.1
  Top Layer w0.2: U3.7 175.56,76.703 178.516,76.703 R10.2 178.832,76.749 179.673,75.908 184.632,75.908 185.332,76.608 R12.2@185.332,76.627 ; R12.2 R12.2@185.332,76.627 ; D1.1@188.026,76.327 185.632,76.327 R12.2@185.332,76.627 ; D1.1 188.026,76.381 188.201,76.556 192.325,76.556 L1.4
NetD1_2: D1.2 L1.1 R10.1 R11.2 U3.6 | length 18.2
  Top Layer w0.2: U3.6 175.666,75.235 178.286,75.235 R10.1 178.806,75.202 179.317,75.202 179.629,75.514 184.568,75.514 185.332,74.751 R11.2@185.332,74.742 ; R11.2 R11.2@185.332,74.742 ; L1.1 192.122,74.879 188.201,74.879 188.026,75.054 D1.2 188.001,75.042 185.632,75.042 R11.2@185.332,74.742
"NetEnable Signal_1": "Enable Signal.1" R8.1 | length 4.2
  Top Layer w0.254: 252.016,70.284 256.173,70.284 R8.1
"NetEnable Signal_2": "Enable Signal.2" R7.1 | length 4.2
  Top Layer w0.254: 252.016,71.984 R7.1
"NetEnable Signal_3": "Enable Signal.3" R6.1 | length 4.2
  Top Layer w0.254: 252.016,73.684 256.198,73.684 R6.1
"NetEnable Signal_4": "Enable Signal.4" N8.3 | length 4.7
  Top Layer w0.254: N8.3 247.448,70.802 247.966,70.284 248.516,70.284
"NetEnable Signal_5": "Enable Signal.5" N7.3 | length 8.4
  Top Layer w0.254: N7.3 240.614,70.918 240.837,71.141 240.937,71.141 241.374,71.577 243.586,71.577 243.992,71.984 248.516,71.984
"NetEnable Signal_6": "Enable Signal.6" N6.3 | length 12.6
  Top Layer w0.254: N6.3@237.227,71.004 237.373,71.15 237.373,71.409 238.049,72.085 243.523,72.085 245.121,73.684 248.516,73.684
"NetFAN SW_1": "FAN SW.1" R43.2 | length 14.2
  Top Layer w0.3: R43.2 56.892,54.725 56.642,54.975 56.642,64.897 59.436,67.691
"NetFAN SW_3": "FAN SW.3" R45.2 | length 4.7
  Top Layer w0.3: 59.436,58.293 62.23,55.499 R45.2
NetIMD_A: IMD.A R2.1 | length 3.2
  Top Layer w0.5: R2.1 118.143,71.183 118.643,71.683 IMD.A
NetIMD_K: IMD.K N2.3 | length 2.8
  Top Layer w0.5: IMD.K N2.3
NetLAUNCH_2: LAUNCH.2 R27.1 R28.1 | length 25.3
  Top Layer w0.254: v1@219.024,53.035 R28.1 R27.1
  Bottom Layer w0.254: v1@219.024,53.035 223.655,57.666 223.655,66.997 224.984,68.326 LAUNCH.2
  other v1: 219.009,53.051
NetLAUNCH_A: LC.A R5.1 | length 4.5
  Top Layer w0.5: LC.A@229.257,71.628 229.257,71.788 LC.A@229.888,72.419 ; LC.A@229.388,72.009 229.433,71.964 LC.A@229.884,71.513 ; LC.A@229.884,71.64 R5.1 ; R5.1@232.537,71.513 R5.1@232.637,71.513
NetLAUNCH_K: LC.K N5.3 | length 3
  Top Layer w0.5: N5.3 LC.K@226.288,72.161
NetN4_3: N4.3 TV.K | length 2.6
  Top Layer w0.5: N4.3 TV.K@204.165,72.314 ; TV.K@204.165,72.187 TV.K@204.342,72.009
"NetPUMP SW_1": "PUMP SW.1" R42.2 | length 13.6
  Top Layer w0.3: v1(70.231,56.134) 70.231,55.106 R42.2
  Bottom Layer w0.3: v1@70.231,56.261 70.231,63.234 72.644,65.647 72.644,67.691
"NetPUMP SW_3": "PUMP SW.3" R44.2 | length 4.4
  Top Layer w0.3: 72.644,58.293 75.184,55.753 R44.2
NetR4_1: R4.1 TV.A | length 2.8
  Top Layer w0.5: TV.A@207.442,72.009 207.442,71.835 TV.A@207.942,71.335 ; TV.A@207.942,71.462 R4.1
NetR9_1: "Rotary Encoder.10" R9.1 R16.1 | length 13.9
  Top Layer w0.254: R16.1 R9.1 194.297,66.548 203.226,66.548 204.316,65.458
NetR13_1: "Rotary Encoder.5" R13.1 R24.2 | length 17.2
  Top Layer w0.254: R24.2 R13.1 204.486,47.027 207.316,49.858
NetR15_1: "Rotary Encoder.9" R15.1 R21.1 | length 16.6
  Top Layer w0.254: R21.1 R15.1 205.929,64.071 207.316,65.458
NetR17_1: "Rotary Encoder.1" R17.1 R22.2 | length 8.2
  Top Layer w0.254: R22.2 R17.1 194.322,59.69 196.98,59.69 197.273,59.396 197.441,59.396 ; 198.016,59.158 197.679,59.158 197.441,59.396 ; 198.182,59.563 198.044,59.425 197.47,59.425 197.441,59.396
NetR18_1: "Rotary Encoder.4" R18.1 R23.2 | length 13.7
  Top Layer w0.254: R23.2 191.287,50.594 191.451,50.431 R18.1 194.17,49.606 203.544,49.606 203.558,49.62 204.078,49.62 204.316,49.858
NetR19_1: "Rotary Encoder.2" R19.1 R25.1 | length 7.8
  Top Layer w0.254: R25.1 193.445,57.238 193.812,56.871 198.624,56.871 198.836,56.658
NetR20_1: "Rotary Encoder.6" R20.1 R26.2 | length 23.3
  Top Layer w0.254: R26.2 R20.1 203.263,53.835 205.586,56.158 213.616,56.158
NetR29_1: R29.1 U1.28 | length 5.8
  Top Layer w0.254: U1.28 184.427,62.202 185.471,63.246 R29.1
NetR40_2: R40.2 U2.6 | length 7.1
  Top Layer w0.254: U2.6 244.449,66.076 247.207,68.834 R40.2
NetR41_2: R41.2 U2.4 | length 6.9
  Top Layer w0.254: U2.4 244.135,64.176 246.38,66.421 R41.2
PUMP_EN: "PUMP SW.2" R31.1 R38.1 U1.58 | length 309.4
  Top Layer w0.254: R31.1@67.207,62.992 72.644,62.992 ; R31.1 67.285,63.551 v1(67.97,64.237) 68.656,64.922 77.495,64.922 81.636,69.063 104.149,69.063 104.495,68.717 162.373,68.717 165.308,65.781 165.308,62.555 168.161,59.702 U1.58 ; v1(67.437,66.548) 67.411,66.574 67.411,67.03 69.457,69.076 71.882,71.501 88.011,71.501 91.186,74.676 102.782,74.676 103.331,75.225 153.121,75.225 156.337,72.009 163.817,72.009 v1@165.97,74.162
  Bottom Layer w0.254: v1@67.31,66.421 67.31,64.897 v1(67.97,64.237) ; v1(165.995,74.162) 234.118,74.162 238.823,78.867 247.281,78.867 248.813,77.335 248.913,77.335 249.186,77.062 R38.1
PUMPPWM: AMPSEAL.9 C21.2 R38.2 R40.1 | length 95.1
  Top Layer w0.254: R40.1 251.293,68.834 C21.2 257.77,68.874 258.96,67.684 262.045,67.684 264.82,70.46 278.028,70.46 281.721,66.767 281.721,65.065 284.975,61.811 AMPSEAL.9 287.947,61.811 290.426,64.291 290.426,66.952 280.924,76.454 v1(267.208,76.454)
  Bottom Layer w0.254: R38.2 266.7,76.962 v1(267.208,76.454)
PUMPPWM3.3: U1.38 U2.1 | length 67.6
  Top Layer w0.254: U1.38 176.51,67.506 180.043,71.04 195.953,71.04 198.112,68.88 219.771,68.88 223.016,65.635 235.553,65.635 235.994,66.076 U2.1
PUSH: C12.2 R25.2 U1.24 | length 10.8
  Top Layer w0.254: U1.24 186.051,60.202 187.489,58.764 C12.2 191.262,58.764 R25.2
RADITMP0: AMPSEAL.4 R32.1 U1.14 | length 168.5
  Top Layer w0.2: R32.1 242.822,59.78 243.648,60.606 257.942,60.606 261.285,63.949 278.045,63.949 279.868,62.127 279.868,61.071 283.127,57.811 AMPSEAL.4
  Top Layer w0.254: U1.14 178.01,53.118 186.805,44.323 231.902,44.323 238.633,51.054 243.484,51.054 248.985,45.553 272.322,45.553 283.121,56.352 ; 283.121,56.353 283.173,56.405 283.173,57.329 AMPSEAL.4
RADITMP1: AMPSEAL.3 R33.1 U1.15 | length 157.4
  Top Layer w0.2: R33.1 257.611,59.78 261.43,63.599 274.395,63.599 275.868,62.127 275.868,61.071 279.127,57.811 AMPSEAL.3
  Top Layer w0.254: U1.15 178.51,53.189 186.972,44.727 231.735,44.727 238.516,51.509 243.601,51.509 245.053,50.057 249.004,46.106 270.286,46.106 279.484,55.303 279.484,57.64 AMPSEAL.3
RADITMP2: AMPSEAL.2 R34.1 U1.16 | length 148.9
  Top Layer w0.2: R34.1 248.964,54.266 250.605,55.907 263.552,55.907 267.244,59.599 273.868,59.599 AMPSEAL.2
  Top Layer w0.254: U1.16 179.01,53.26 187.139,45.131 231.567,45.131 238.349,51.913 243.769,51.913 249.172,46.51 270.119,46.51 275.614,52.005 AMPSEAL.2@275.614,57.811
RADITMP3: AMPSEAL.1 R35.1 U1.17 | length 115.6
  Top Layer w0.2: 238.209,52.344 239.43,52.344 241.479,54.393 R35.1
  Top Layer w0.254: U1.17 181.06,51.782 187.307,45.535 231.4,45.535 238.209,52.344 ; 239.43,52.344 243.909,52.344 249.339,46.914 269.951,46.914 271.577,48.539 AMPSEAL.1@271.577,57.404
RGB_BLUE: N8.1 U1.39 | length 73.5
  Top Layer w0.254: U1.39 176.01,67.578 179.876,71.444 196.12,71.444 198.222,69.342 219.881,69.342 223.184,66.039 235.386,66.039 236.049,66.703 241.13,66.703 243.129,68.702 N8.1
RGB_GREEN: N7.1 U1.40 | length 70.6
  Top Layer w0.254: U1.40 175.51,67.649 179.709,71.848 196.287,71.848 198.389,69.746 220.048,69.746 223.351,66.443 231.817,66.443 232.608,67.234 238.18,67.234 239.664,68.718 N7.1
RGB_RED: N6.1 U1.41 | length 66.2
  Top Layer w0.254: U1.41 175.019,66.261 175.019,67.729 179.541,72.252 196.455,72.252 198.55,70.156 212.142,70.156 212.344,70.358 234.669,70.358 235.877,69.15 235.977,69.15 236.2,68.927 N6.1
RST_TC: "Tag Connect.3" R14.1 U1.7 | length 15.5
  Top Layer w0.2: U1.7 174.529,54.633 174.529,51.683 v1(174.549,51.664) ; v1(175.551,47.955) 177.355,47.955 R14.1
  Bottom Layer w0.2: 170.586,44.856 171.694,45.964 173.879,45.964 175.616,47.701 175.616,49.149 175.616,50.597 v1(174.549,51.664)
SCREEN_DC: LEFTPINS.13 U1.36 | length 104.5
  Top Layer w0.2: LEFTPINS.13 85.103,49.276 89.065,53.238 159.749,53.238 ccw(c160.02,54.356) 160.291,53.238 161.315,53.238 162.56,54.483 162.56,55.931 164.211,57.582 v1(167.589,57.582) ; v1(171.501,58.623) 171.501,61.949 172.654,63.102 175.954,63.102 177.51,64.658 U1.36
  Bottom Layer w0.2: v1(167.589,57.582) 168.977,57.582 169.078,57.48 170.358,57.48 v1(171.501,58.623)
SPI_MISO: LEFTPINS.16 U1.10 | length 100.4
  Top Layer w0.2: LEFTPINS.16 87.579,60.655 162.041,60.655 v1(164.581,63.195) ; v1(173.253,60.985) 176.01,58.229 U1.10
  Bottom Layer w0.2: v1(164.581,63.195) 171.044,63.195 v1(173.253,60.985)
SPI_MOSI: LEFTPINS.15 U1.9 | length 98.6
  Top Layer w0.2: LEFTPINS.15 85.471,54.356 89.357,58.242 163.779,58.242 v1(166.167,60.63) ; v1(173.203,59.868) 175.51,57.56 U1.9
  Bottom Layer w0.2: v1(166.167,60.63) 169.244,60.63 169.358,60.743 172.327,60.743 v1(173.203,59.868)
SPI_SCLK: LEFTPINS.17 U1.29 | length 101.6
  Top Layer w0.2: LEFTPINS.17 84.006,59.622 84.87,59.622 88.519,63.271 161.214,63.271 162.56,64.618 v1(164.541,64.618) ; v1(173.349,62.052) 176.784,62.052 177.434,62.702 U1.29
  Bottom Layer w0.2: v1(164.541,64.618) 165.633,65.71 169.692,65.71 v1(173.349,62.052)
SPI_SS: LEFTPINS.14 U1.33 | length 104.1
  Top Layer w0.2: LEFTPINS.14 85.877,51.816 89.738,55.677 161.709,55.677 164.173,58.141 165.989,58.141 v1(167.132,59.284) ; v1(172.364,59.106) 172.364,60.732 172.314,60.782 172.314,62.267 172.799,62.752 176.335,62.752 179.001,65.419 179.001,66.243 U1.33
  Bottom Layer w0.2: v1(167.132,59.284) 169.926,59.284 170.021,59.189 170.187,59.189 170.637,59.639 171.831,59.639 171.89,59.581 v1(172.364,59.106)
SWCLK_TC: "Tag Connect.4" U1.49 | length 30.7
  Top Layer w0.2: U1.49 171.217,64.202 171.328,64.313 v1(172.593,64.313)
  Bottom Layer w0.2: 169.316,44.856 167.954,46.219 166.598,46.219 165.329,47.488 165.329,49.111 167.958,51.74 170.307,51.74 174.106,55.539 174.106,62.8 v1(172.593,64.313)
SWDIO_TC: "Tag Connect.2" U1.46 | length 29.2
  Top Layer w0.2: U1.46 172.529,66.233 172.529,65.446 173.46,64.516 v1(174.142,64.516)
  Bottom Layer w0.2: 169.316,46.126 169.266,46.126 168.796,46.596 166.754,46.596 165.824,47.526 165.824,49.111 168.021,51.308 170.688,51.308 174.523,55.143 174.523,64.048 174.142,64.429 v1(174.142,64.516)
SWITCH_A: C8.2 R22.1 U1.25 | length 11.2
  Top Layer w0.254: U1.25 185.289,60.702 186.639,62.052 C8.2@189.644,62.052 ; C8.2 191.044,62.193 191.07,62.167 R22.1
SWITCH_B: C10.2 R23.1 U1.22 | length 14.9
  Top Layer w0.254: U1.22 184.74,59.202 187.782,56.159 187.782,53.379 188.807,52.355 188.807,52.305 189.155,51.957 C10.2 191.262,51.957 R23.1
SWITCH_C: C13.2 R26.1 U1.23 | length 12.3
  Top Layer w0.254: U1.23 185.052,59.702 C13.2@189.025,55.729 ; C13.2@188.807,55.758 188.807,55.708 189.155,55.36 C13.2 191.262,55.36 R26.1
TV_LED_ON: N4.1 U1.43 | length 29.6
  Top Layer w0.254: U1.43 174.019,66.261 174.019,67.974 179.182,73.137 N4.1@199.787,73.137
pads on no net: "ENABLE SW.1" "Rotary Encoder.11" "Tag Connect.6" "Tag Connect." AMPSEAL.15 AMPSEAL.16 AMPSEAL.17 AMPSEAL.18 LEFTPINS.1 LEFTPINS.2 LEFTPINS.3 LEFTPINS.4 LEFTPINS.5 LEFTPINS.6 LEFTPINS.7 LEFTPINS.8 LEFTPINS.9 LEFTPINS.10 LEFTPINS.11 LEFTPINS.12 LEFTPINS.18 RIGHTPINS.1 RIGHTPINS.2 RIGHTPINS.3 RIGHTPINS.4 RIGHTPINS.5 RIGHTPINS.6 RIGHTPINS.7 RIGHTPINS.8 RIGHTPINS.9 RIGHTPINS.10 RIGHTPINS.11 RIGHTPINS.12 RIGHTPINS.13 RIGHTPINS.14 RIGHTPINS.15 RIGHTPINS.16 RIGHTPINS.17 RIGHTPINS.18 U1.2 U1.3 U1.4 U1.5 U1.6 U1.8 U1.11 U1.30 U1.50 U1.54 U1.55 U1.56 U1.59 U1.61 U1.62

## Polygon pours and split planes (outlines as drawn)
GND on Bottom Layer "GND_L02_P004" (solid, pour order 4): 53.315,79.375 53.315,43.459 64.389,43.459 76.733,31.115 166.599,31.115 178.943,43.459 305.435,43.459 305.435,79.375
GND on Top Layer "GND_L01_P005" (solid, pour order 5): 53.315,79.375 53.315,43.459 64.389,43.459 76.733,31.115 166.599,31.115 178.943,43.459 305.46,43.459 305.46,79.375

## Silkscreen, mask and mechanical layers (free items; w line width, h text height)
Top Overlay:
  text "EN" at 246.626,74.414 h4.5
  text "Pump" at 68.064,71.056 h2.5
  text "Fans" at 54.856,70.985 h2.5
  text "On" at 77.081,66.54 h2.5
  text "Enable" at 255.643,61.46 h2.5
  text "Off" at 76.788,56.919 h2.5
  text "Disable" at 255.643,52.189 h2.5
  text "+3V3" at 60.452,51.181 h1.54
  text "+5V" at 70.485,51.054 h1.54
Mechanical 1:
  lines w0.254: 52.705,43.053 cw(c52.705,16.129) 79.629,16.129 ; 163.703,16.129 cw(c190.627,16.129) 190.627,43.053